# Altium PCB CAMERON.PcbDoc (part 2 of 2)
Units mil, origin at the board's own origin, x right, y up, seen from the top; angles counter-clockwise.
Board outline 6000 x 4900 mil, 4 copper layers (Top, POWER, GND, Bottom), stack 33.234 mil thick; 130 components, 113 nets, 631 pads, 154 vias.
Unrouted connection lines stored in the file: 5.
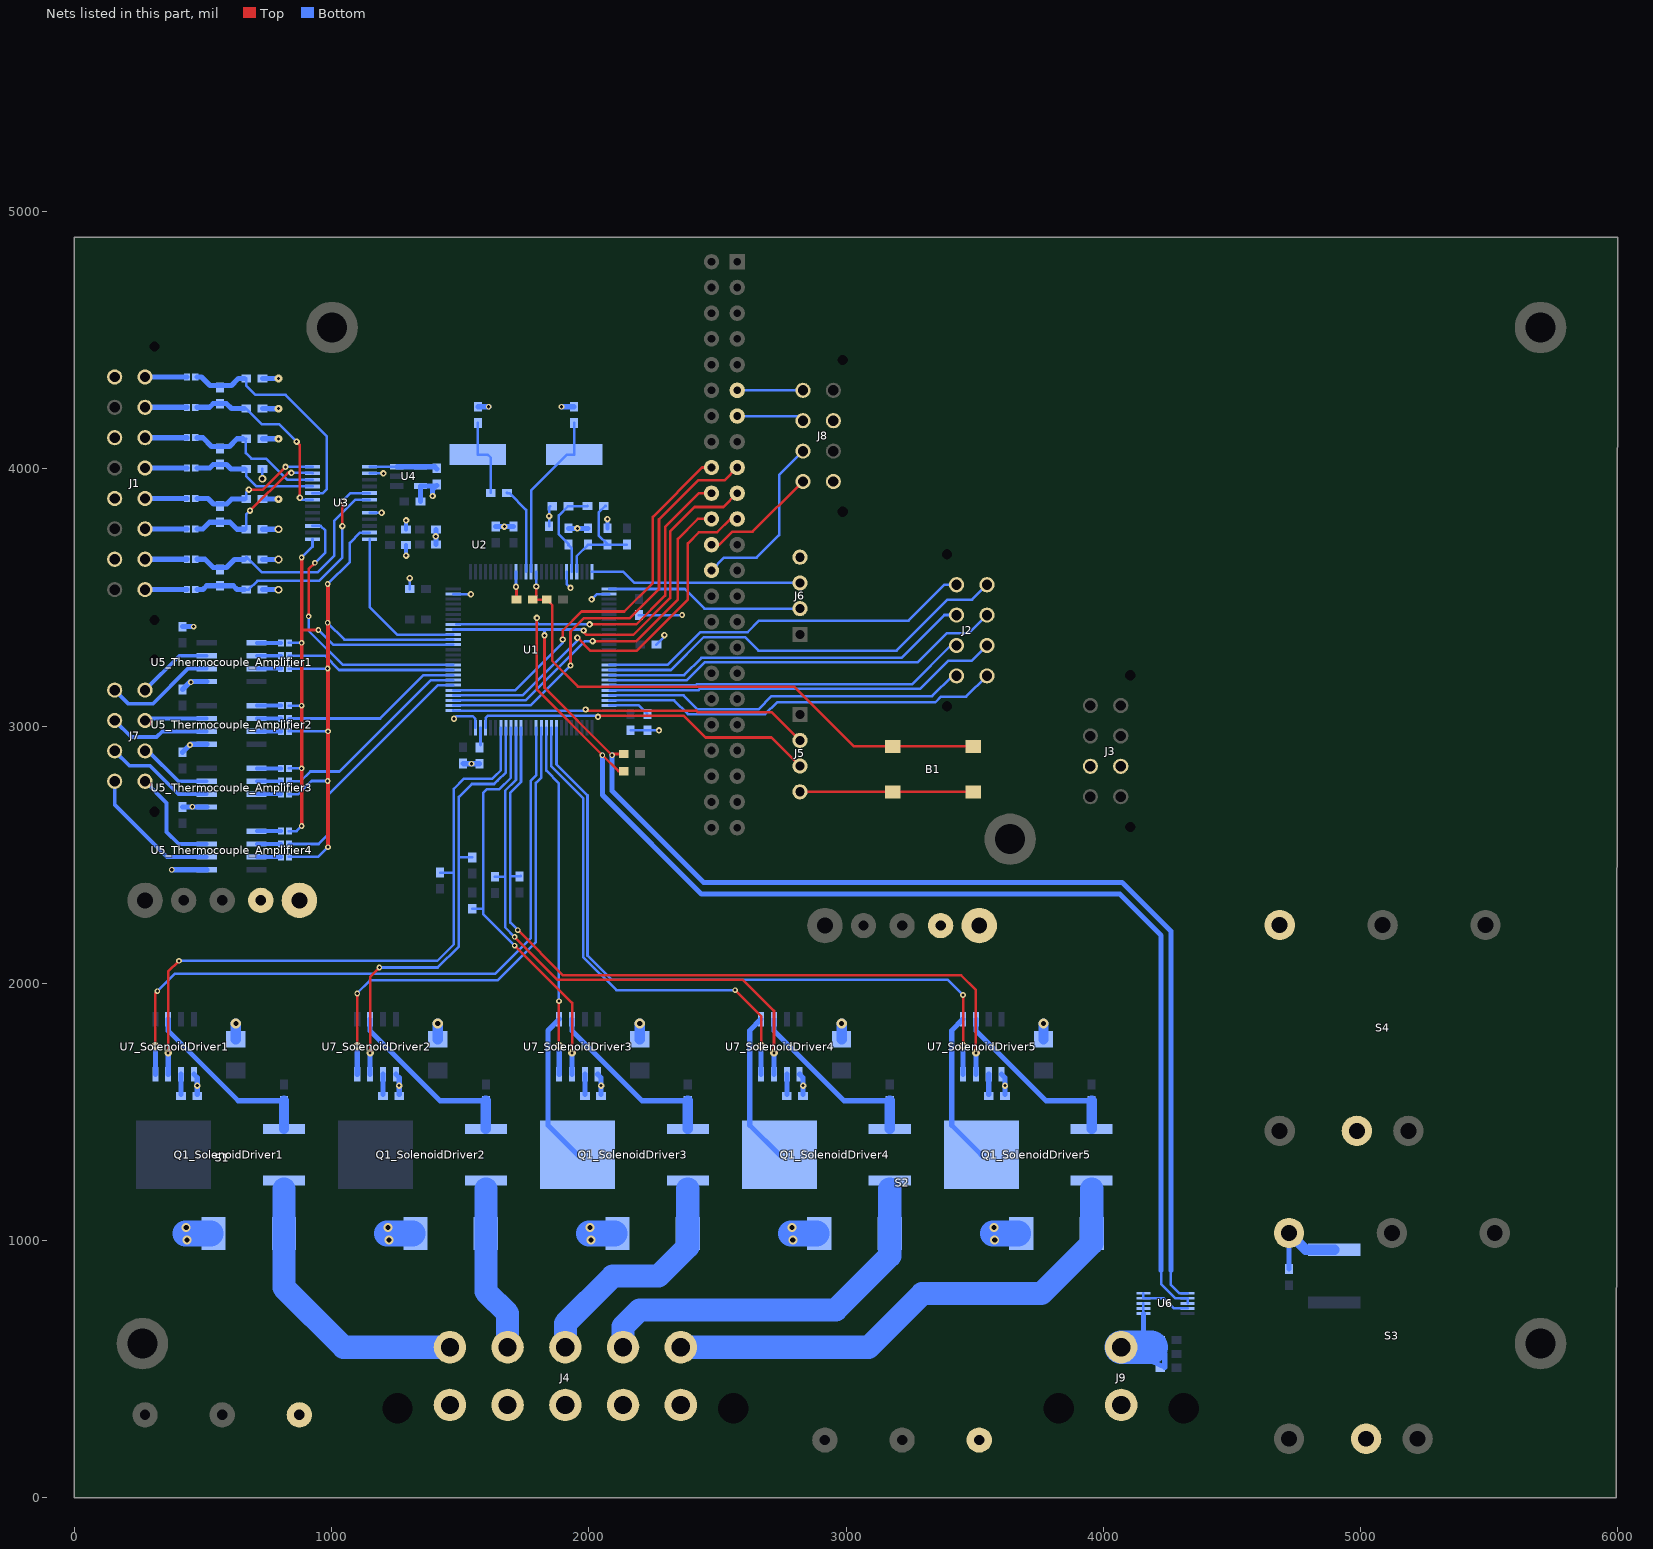
[diagram p4: the nets of this part, all layers, seen from the top]

## Via types
v1: diameter 25, hole 12, Top to Bottom, tented both sides, 50 vias
v2: diameter 22, hole 12, Top to Bottom, tented both sides, 45 vias
v3: diameter 50, hole 28, Top to Bottom, 16 vias
v4: diameter 40, hole 20, Top to Bottom, tented both sides, 15 vias
v5: diameter 30, hole 12, Top to Bottom, tented both sides, 14 vias
v6: diameter 35, hole 20, Top to Bottom, tented both sides, 10 vias
v7: diameter 30, hole 18, Top to Bottom, tented both sides, 4 vias

## Nets (pads, with @x,y where several pads share a name; then routed paths per layer and width w, separated by ;. In a path a pad name is that pad's centre, name@x,y a point inside that pad or via, vN(x,y) a via of type N, cw(c..) or ccw(c..) an arc to the next point about the centre after c; other vN are vias at no path point) (continued)
Gate_SolenoidDriver3: Q1_SolenoidDriver3.2 U7_SolenoidDriver3.5 | length 593.1
  Bottom w20: U7_SolenoidDriver3.5@1885,1861.28 1841,1817.28 1841,1448.93 Q1_SolenoidDriver3.2@1955.93,1334
Gate_SolenoidDriver4: Q1_SolenoidDriver4.2 U7_SolenoidDriver4.5 | length 593.1
  Bottom w20: U7_SolenoidDriver4.5@2670,1861.28 2626,1817.28 2626,1448.93 Q1_SolenoidDriver4.2@2740.93,1334
Gate_SolenoidDriver5: Q1_SolenoidDriver5.2 U7_SolenoidDriver5.5 | length 593.1
  Bottom w20: U7_SolenoidDriver5.5@3455,1861.28 3411,1817.28 3411,1448.93 Q1_SolenoidDriver5.2@3525.93,1334
GND: B1.2 C1.1 C2.1 C3.1 C4.1 C5.1 C6.1 C7.1 C8.1 C9.1 C10.1 C11.1 C12.1 C13.1 C14.2 C15.2 C16.1 C17.1 C19.1 C20.1 C22.1 C23.1 C26.1 C27.1 C28.1 C29.1 C30.1 C31.1 C32.1 C33.1 C34.1 C35.1 C36.1 C37_Thermocouple_Amplifier1.1 C37_Thermocouple_Amplifier2.1 C37_Thermocouple_Amplifier3.1 C37_Thermocouple_Amplifier4.1 C38_SolenoidDriver1.1 C38_SolenoidDriver2.1 C38_SolenoidDriver3.1 C38_SolenoidDriver4.1 C38_SolenoidDriver5.1 C39_SolenoidDriver1.1 C39_SolenoidDriver2.1 C39_SolenoidDriver3.1 C39_SolenoidDriver4.1 C39_SolenoidDriver5.1 D1_SolenoidDriver1.1 D1_SolenoidDriver2.1 D1_SolenoidDriver3.1 D1_SolenoidDriver4.1 D1_SolenoidDriver5.1 J1.1 J1.5 J1.9 J1.13 J3.5 J3.6 J4.2 J4.4 J4.6 J4.8 J4.10 J5.4 J6.4 J8.4 J8.8 J9.2 R4.1 S1.3 S1.4 S1.5 S2.3 S2.4 S2.5 S3.2 S3.5 S4.2 S4.5 U1.10 U1.20 U1.27 U1.74 U1.99 U3.14 U3.20 U4.5 U5_Thermocouple_Amplifier1.1 U5_Thermocouple_Amplifier2.1 U5_Thermocouple_Amplifier3.1 U5_Thermocouple_Amplifier4.1 U6.4 U6.5 U6.9 U7_SolenoidDriver1.1 U7_SolenoidDriver2.1 U7_SolenoidDriver3.1 U7_SolenoidDriver4.1 U7_SolenoidDriver5.1 | length 5045.9
  Top w10: v1(1717,3542) 1719,3540 C36.1@1719,3492 ; J5.4@2821,2745 B1.2@3491,2745
  Bottom w10: v7(731.31,3961.69) C29.1@731.31,4000.01 ; U3.20@1148,3829.61 v1(1194.61,3829.61) ; U3.14@1148,3983.16 v1(1201.84,3983.16) ; C2.1@1304.13,3533.37 v1(1304.13,3575.87) ; U1.99@1472.91,3513.69 1541.31,3513.69 v1(1542,3513) ; v1(1476,3029) 1486,3039 1549,3039 1559.52,3028.48 U1.74@1559.52,2994 ; v1(1717,3542) U1.10@1717,3600.3 ; C6.1@1846,3777 v1(1846,3817) 1846,3850.87 C15.2@1850.13,3855 ; U1.20@1913.85,3600.3 1913.85,3553.15 v1(1929,3538) ; v1(2011,3493) 2031.69,3513.69 U1.27@2079.2,3513.69 ; C4.1@2163,2984 C10.1@2228,2984 v1(2273,2984) ; C5.1@2195,3432 v2(2363,3432) ; R4.1@2263,3316.83 2294,3347.83 v1(2294,3354) ; U6.5@4156,795.72 U6.4@4156,776.02 4235.98,776.02 v2(4252,760) 4275.38,736.62 U6.9@4328,736.62
  Bottom w15: v1(1290,3663) C22.1@1290,3705 ; C23.1@1290,3764 v1(1290,3800) ; C13.1@2072.33,3769.13 v1(2072.33,3805.33)
  Bottom w20: v2(379,2442) U5_Thermocouple_Amplifier4.1@514.95,2442 ; C37_Thermocouple_Amplifier4.1@421,2686 U5_Thermocouple_Amplifier3.1@514.95,2686 ; C37_Thermocouple_Amplifier3.1@421,2899 452,2930 U5_Thermocouple_Amplifier2.1@514.95,2930 ; C37_Thermocouple_Amplifier2.1@421,3143 452,3174 U5_Thermocouple_Amplifier1.1@514.95,3174 ; C37_Thermocouple_Amplifier1.1@421,3387 v2(464,3387) ; U7_SolenoidDriver1.1@465,1646.72 478,1633.72 v1(478,1603) C39_SolenoidDriver1.1@478,1568 ; C33.1@731.31,3531 793.77,3531 v7(794,3530.77) ; C32.1@731.31,3648.25 793.77,3648.25 v7(794,3648.02) ; C31.1@731.31,3765.51 793.77,3765.51 v7(794,3765.28) ; C30.1@731.31,3882.76 793.77,3882.76 v5(794,3882.53) ; C28.1@731.31,4117.27 793.77,4117.27 v5(794,4117.04) ; C27.1@731.31,4234.52 759.03,4234.52 759.26,4234.29 v5(794,4234.29) ; C26.1@731.31,4351.77 793.77,4351.77 v5(794,4351.54) ; U7_SolenoidDriver2.1@1250,1646.72 1263,1633.72 v1(1263,1603) C39_SolenoidDriver2.1@1263,1568 ; C35.1@1346,3874 U4.5@1346,3933.94 C34.1@1405.2,3933.94 ; v1(1393,3895) 1393,3920.4 C34.1@1409,3936.4 ; C19.1@1406,3706 C20.1@1406,3765 ; C3.1@1511.78,2855 1512.78,2854 v2(1544,2854) C11.1@1574,2854 ; C16.1@1569,4242 v2(1611,4242) ; C1.1@1638.26,3776 v1(1672,3776) C7.1@1708,3776 ; v2(1894,4242) C17.1@1943,4242 ; C14.2@1921.33,3769.13 C12.1@1996.67,3769.13 ; U7_SolenoidDriver3.1@2035,1646.72 2048,1633.72 v1(2048,1603) C39_SolenoidDriver3.1@2048,1568 ; U7_SolenoidDriver4.1@2820,1646.72 2833,1633.72 v1(2833,1603) C39_SolenoidDriver4.1@2833,1568 ; U7_SolenoidDriver5.1@3605,1646.72 3618,1633.72 v1(3618,1603) C39_SolenoidDriver5.1@3618,1568 ; C9.1@4722,890 S3.5@4722,1030
  Bottom w40: C38_SolenoidDriver1.1@628,1783 v4(628,1844) ; C38_SolenoidDriver2.1@1413,1783 v4(1413,1844) ; C38_SolenoidDriver3.1@2198,1783 v4(2198,1844) ; C38_SolenoidDriver4.1@2983,1783 v4(2983,1844) ; C38_SolenoidDriver5.1@3768,1783 v4(3768,1844) ; S3.5@4722,1030 4787.28,964.72 C8.1@4898,964.72
  Bottom w100: 431,1028 D1_SolenoidDriver1.1@530,1028 ; 1216,1028 D1_SolenoidDriver2.1@1315,1028 ; 2001,1028 D1_SolenoidDriver3.1@2100,1028 ; 2786,1028 D1_SolenoidDriver4.1@2885,1028 ; 3571,1028 D1_SolenoidDriver5.1@3670,1028
  other v1: 1405,3738 1956,3769
  other v2: 459,2687 450,2927 453,3171
  other v6: 438,1003 1223,1003 2008,1003 2793,1003 3578,1003 435,1051 1220,1051 2005,1051 2790,1051 3575,1051
GPIO1: J2.8 U1.41 | length 1480.3
  Bottom w10: U1.41@2079.2,3238.09 2306.09,3238.09 2434,3366 2460.24,3366 2460.57,3365.67 2593.7,3365.67 2594.03,3366 2618,3366 2662,3410 3243,3410 3383.44,3550.44 J2.8@3429.89,3550.44
GPIO2: J2.7 U1.42 | length 1649.2
  Bottom w10: U1.42@2079.2,3218.41 2319.41,3218.41 2447,3346 2607,3346 2659,3294 3197,3294 3395,3492 3490,3492 J2.7@3548,3550
GPIO3: J2.6 U1.43 | length 1447.4
  Bottom w10: U1.43@2079.2,3198.72 2370.72,3198.72 2437.67,3265.67 3215.67,3265.67 3382.33,3432.33 J2.6@3429.89,3432.33
GPIO4: J2.5 U1.44 | length 1573.5
  Bottom w10: U1.44@2079.2,3179.04 2381.04,3179.04 2451,3249 3279,3249 3391,3361 3477.11,3361 J2.5@3548,3431.89
I2C_SCL: R17.2 U1.92 U2.19 U6.6 | length 6132.3
  Top w10: v1(1828,3353) 1828,3150 v2(2091,2887) 2096,2892 R17.2@2136,2892 ; v1(1980,3372) 1980,3365.64 1990.64,3355 2173,3355 2316,3498 2316,3757 2411,3852 2523.46,3852 U2.19@2577.13,3905.67
  Bottom w10: U1.92@1472.91,3375.89 1828,3375.89 ; v1@1828,3352 v1(1828,3353) 1828,3375.89 ; v1(1980,3372) 1976.11,3375.89 1828,3375.89 ; 4263,885 4263,828 4295.28,795.72 U6.6@4328,795.72
  Bottom w20: v2(2091,2887) 2091,2748 2446,2393 4072.74,2393 4263,2202.74 4263,885
I2C_SDA: R18.2 U1.93 U2.20 U6.7 U6.8 | length 6191.6
  Top w10: v1(1798,3421) 1798,3142 v2(2053,2887) 2115,2825 R18.2@2136,2825 ; v1(2003,3395.57) 2184.57,3395.57 2297,3508 2297,3775.04 2427.64,3905.67 U2.20@2477.13,3905.67
  Bottom w10: U1.93@1484.52,3395.57 1806,3395.57 ; v1(1798,3421) 1798,3403.57 1806,3395.57 ; v1(2003,3395.57) 2002.13,3396.44 1806.87,3396.44 1806,3395.57 ; 4225,884 4225,832 4280.98,776.02 U6.7@4328,776.02 U6.8@4328,756.32
  Bottom w20: v2(2053,2887) 2053,2732.26 2438.26,2347 4065,2347 4225,2187 4225,884
LimSwitch1-P1: J2.2 U1.47 | length 1427
  Bottom w10: U1.47@2079.2,3119.98 2369.02,3119.98 2423.33,3065.67 2659.67,3065.67 2711,3117 3335,3117 3413.67,3195.67 J2.2@3429.89,3195.67
LimSwitch1-P2: J2.1 U1.48 | length 1552.5
  Bottom w10: U1.48@2079.2,3100.3 2331.7,3100.3 2385,3047 2686,3047 2732,3093 3347,3093 3369,3115 3467.33,3115 J2.1@3548,3195.67
LimSwitch2-P1: J2.4 U1.45 | length 1412.7
  Bottom w10: U1.45@2081.2,3159.63 2416.63,3159.63 2420,3163 3256,3163 3407.22,3314.22 J2.4@3429.89,3314.22
LimSwitch2-P2: J2.3 U1.46 | length 1592.8
  Bottom w10: U1.46@2081.2,3139.94 2426.94,3139.94 2433,3146 3289,3146 3397,3254 3488.22,3254 J2.3@3548,3313.78 ; 2342.67,3139.67 2396.67,3139.67
MISO: SB2_Thermocouple_Amplifier1.2 SB2_Thermocouple_Amplifier2.2 SB2_Thermocouple_Amplifier3.2 SB2_Thermocouple_Amplifier4.2 U1.90 U3.23 | length 2470.8
  Top w10: v2(985,2787) v2@986,2788
  Top w15: v2(985,3224) 986,3225 986,3552 v2(985,3553) ; v2(986,2530) 986,2788 v2(986,2980) v2@986,3224
  Bottom w10: SB2_Thermocouple_Amplifier4.2@834.69,2492 948,2492 v2(986,2530) ; SB2_Thermocouple_Amplifier3.2@834.69,2736 871,2736 922,2787 v2(985,2787) ; SB2_Thermocouple_Amplifier2.2@834.69,2980 836.69,2982 SB2_Thermocouple_Amplifier2.2@837.69,2981 ; SB2_Thermocouple_Amplifier1.2@834.69,3224 v2(985,3224) ; SB2_Thermocouple_Amplifier2.2@837.69,2980 v2(986,2980) ; v2(985,3402) 1050.48,3336.52 U1.90@1472.91,3336.52 ; v2(985,3553) 1071,3639 1071,3713 1110.84,3752.84 U3.23@1148,3752.84
MOSI: U1.91 U3.24 | length 633.4
  Bottom w10: U3.24@1148,3727.25 1148,3463 1254.8,3356.2 U1.91@1472.91,3356.2
NetC10_2: C10.2 U1.49 | length 162.7
  Bottom w10: U1.49@2079.2,3080.61 2194.39,3080.61 C10.2@2228,3047
NetC11_2: C11.2 U1.73 | length 67.2
  Bottom w10: C11.2@1579.2,2926.8 U1.73@1579.2,2994
NetC12_2: C12.2 C13.2 FB1.1 R1.2 U1.22 | length 451.9
  Bottom w10: U1.22@1953.22,3600.3 1953.22,3660.72 1996.67,3704.17 C12.2@1996.67,3706.13 C13.2@2072,3706.13 ; R1.2@2066,3856 2064.03,3856 2038,3829.97 2038,3742.1 2072,3708.1 C13.2@2072,3706.13 ; FB1.1@2148,3706.13 C13.2@2072.33,3706.13 C13.2@2072,3706.13
NetC14_1: C14.1 C15.1 R1.1 U1.21 | length 366.2
  Bottom w10: U1.21@1933.54,3600.3 1933.54,3691.96 1921.33,3704.17 C14.1@1921.33,3706.13 1921.33,3708.1 1884,3745.44 1884,3819.97 1919.03,3855 C15.1@1921,3855 1994.13,3855 R1.1@1995.13,3856
NetC16_2: C16.2 R2.1 X1.1 | length 315
  Bottom w10: C16.2@1569,4179 X1.1@1569,4056 1607,4056 1619,4044 R2.1@1619,3907
NetC18_1: C18.1 C27.2 R6.2 U3.7 | length 723
  Top w10: v1(864,4106) 876,4094 876,3888 v1(877,3888)
  Bottom w10: C27.2@668.31,4234.52 729.83,4173 797,4173 v1(864,4106) ; v1(877,3888) 877,3885 881.2,3880.8 U3.7@926,3880.8
  Bottom w20: R6.2@478,4239.66 526.01,4239.66 540.25,4253.91 C18.1@566,4253.91 591.75,4253.91 611.13,4234.52 C27.2@660.45,4234.52
NetC18_2: C18.2 C26.2 R5.2 U3.8 | length 898
  Bottom w10: C26.2@668.31,4351.77 668.31,4323.69 704,4288 821,4288 982,4127 982,3922 966.39,3906.39 U3.8@926,3906.39
  Bottom w20: R5.2@478,4357.77 494.81,4357.77 527.81,4324.77 610.73,4324.77 637.73,4351.77 C26.2@660.45,4351.77
NetC21_1: C21.1 C29.2 R8.2 U3.9 | length 496.9
  Bottom w10: C29.2@668.31,4000.01 668.31,3972.69 709.02,3931.98 U3.9@926,3931.98
  Bottom w20: R8.2@478,4003.44 526.79,4003.44 540.25,4016.91 C21.1@566,4016.91 591.75,4016.91 608.64,4000.01 C29.2@660.45,4000.01
NetC21_2: C21.2 C28.2 R7.2 U3.10 | length 578.7
  Bottom w10: C28.2@668.31,4117.27 655.73,4117.27 667,4106 667,4062 689,4040 746,4040 828.43,3957.57 U3.10@926,3957.57
  Bottom w20: R7.2@478,4121.55 499.81,4121.55 533.59,4087.77 603.24,4087.77 632.73,4117.27 C28.2@655.73,4117.27
NetC24_1: C24.1 C31.2 R10.2 U3.11 | length 587.6
  Top w10: v1(683,3838) 830,3985 v1(844,3985)
  Bottom w10: C31.2@668.31,3765.51 668.31,3823.31 v1(683,3838) ; v1(844,3985) 924.16,3985 U3.11@926,3983.16
  Bottom w20: R10.2@478,3767.22 499.81,3767.22 525.36,3792.77 C24.1@567,3792.77 605.47,3792.77 632.73,3765.51 C31.2@660.45,3765.51
NetC24_2: C24.2 C30.2 R9.2 U3.12 | length 524.8
  Top w10: v1(679,3920) 733,3920 v1(821,4008)
  Bottom w10: C30.2@668.31,3882.76 668.31,3909.31 v1(679,3920) ; v1(821,4008) 925.25,4008 U3.12@926,4008.75
  Bottom w20: R9.2@478,3885.33 519.56,3885.33 541.25,3863.64 592.75,3863.64 611.87,3882.76 C30.2@660.45,3882.76
NetC25_1: C25.1 C33.2 R12.2 U3.17 | length 958.3
  Top w10: v1(1042,3778) v1(1042,3875)
  Bottom w10: C33.2@668.31,3531 678,3531 712,3565 951,3565 1042,3656 v1(1042,3778) ; v1(1042,3875) 1073.39,3906.39 U3.17@1148,3906.39
  Bottom w20: R12.2@478,3531 499.81,3531 514.72,3545.91 C25.1@566,3545.91 617.83,3545.91 632.73,3531 C33.2@660.45,3531
NetC25_2: C25.2 C32.2 R11.2 U3.18 | length 921.2
  Bottom w10: C32.2@668.31,3648.25 668.31,3659.31 729.63,3598 946,3598 1010,3662 1010,3797 1093.8,3880.8 U3.18@1148,3880.8
  Bottom w20: R11.2@478,3649.11 507.91,3649.11 540.25,3616.77 591.75,3616.77 623.23,3648.25 C32.2@660.45,3648.25
NetC39_SolenoidDriver1_2: C39_SolenoidDriver1.2 U7_SolenoidDriver1.2 | length 78.7
  Bottom w20: C39_SolenoidDriver1.2@415,1568 U7_SolenoidDriver1.2@415,1646.72
NetC39_SolenoidDriver2_2: C39_SolenoidDriver2.2 U7_SolenoidDriver2.2 | length 78.7
  Bottom w20: C39_SolenoidDriver2.2@1200,1568 U7_SolenoidDriver2.2@1200,1646.72
NetC39_SolenoidDriver3_2: C39_SolenoidDriver3.2 U7_SolenoidDriver3.2 | length 78.7
  Bottom w20: C39_SolenoidDriver3.2@1985,1568 U7_SolenoidDriver3.2@1985,1646.72
NetC39_SolenoidDriver4_2: C39_SolenoidDriver4.2 U7_SolenoidDriver4.2 | length 78.7
  Bottom w20: C39_SolenoidDriver4.2@2770,1568 U7_SolenoidDriver4.2@2770,1646.72
NetC39_SolenoidDriver5_2: C39_SolenoidDriver5.2 U7_SolenoidDriver5.2 | length 78.7
  Bottom w20: C39_SolenoidDriver5.2@3555,1568 U7_SolenoidDriver5.2@3555,1646.72
NetJ8_1: J8.1 U2.11 | length 255.6
  Bottom w10: U2.11@2577.13,4305.67 J8.1@2832.71,4305.67
NetJ8_3: J8.3 U2.13 | length 263.1
  Bottom w10: U2.13@2577.13,4205.67 2814.6,4205.67 J8.3@2832.71,4187.56
NetJ8_5: J8.5 U2.26 | length 684.6
  Bottom w10: U2.26@2477.13,3605.67 2526.46,3655 2652,3655 2740,3743 2740,3976.74 J8.5@2832.71,4069.45
NetJ8_7: J8.7 U2.24 | length 457.3
  Top w10: U2.24@2477.13,3705.67 2507.67,3705.67 2558,3756 2637.37,3756 J8.7@2832.71,3951.34
NetJ9_1: J9.1 R14.1 R15.1 R16.1 U6.1 U6.2 U6.3 | length 590.2
  Bottom w10: U6.1@4156,716.92 U6.2@4156,736.62 U6.3@4156,756.32 ; R16.1@4232.68,616 4232.68,622.63 R16.1@4239.32,616
  Bottom w20: J9.1@4069.91,585.83 4239.32,508 R14.1@4239.32,562 ; 4156,580.65 U6.1@4156,716.92 ; 4156,615.65 4185.83,585.83
  Bottom w130: J9.1@4069.91,585.83 4185.83,585.83
NetQ1_SolenoidDriver1_1: Q1_SolenoidDriver1.1 R20_SolenoidDriver1.1 U7_SolenoidDriver1.6 | length 718
  Bottom w20: U7_SolenoidDriver1.6@365,1861.28 365,1816 637,1544 R20_SolenoidDriver1.1@815,1544
  Bottom w40: R20_SolenoidDriver1.1@815,1544 815,1434.06 Q1_SolenoidDriver1.1@815.06,1434
NetQ1_SolenoidDriver2_1: Q1_SolenoidDriver2.1 R20_SolenoidDriver2.1 U7_SolenoidDriver2.6 | length 718
  Bottom w20: U7_SolenoidDriver2.6@1150,1861.28 1150,1816 1422,1544 R20_SolenoidDriver2.1@1600,1544
  Bottom w40: R20_SolenoidDriver2.1@1600,1544 1600,1434.06 Q1_SolenoidDriver2.1@1600.06,1434
NetQ1_SolenoidDriver3_1: Q1_SolenoidDriver3.1 R20_SolenoidDriver3.1 U7_SolenoidDriver3.6 | length 718
  Bottom w20: U7_SolenoidDriver3.6@1935,1861.28 1935,1816 2207,1544 R20_SolenoidDriver3.1@2385,1544
  Bottom w40: R20_SolenoidDriver3.1@2385,1544 2385,1434.06 Q1_SolenoidDriver3.1@2385.06,1434
NetQ1_SolenoidDriver4_1: Q1_SolenoidDriver4.1 R20_SolenoidDriver4.1 U7_SolenoidDriver4.6 | length 718
  Bottom w20: U7_SolenoidDriver4.6@2720,1861.28 2720,1816 2992,1544 R20_SolenoidDriver4.1@3170,1544
  Bottom w40: R20_SolenoidDriver4.1@3170,1544 3170,1434.06 Q1_SolenoidDriver4.1@3170.06,1434
NetQ1_SolenoidDriver5_1: Q1_SolenoidDriver5.1 R20_SolenoidDriver5.1 U7_SolenoidDriver5.6 | length 718
  Bottom w20: U7_SolenoidDriver5.6@3505,1861.28 3505,1816 3777,1544 R20_SolenoidDriver5.1@3955,1544
  Bottom w40: R20_SolenoidDriver5.1@3955,1544 3955,1434.06 Q1_SolenoidDriver5.1@3955.06,1434
NetSB1_Thermocouple_Amplifier1_1: SB1_Thermocouple_Amplifier1.1 U5_Thermocouple_Amplifier1.6 | length 94.1
  Bottom w15: U5_Thermocouple_Amplifier1.6@709.05,3274 SB1_Thermocouple_Amplifier1.1@803.19,3274
NetSB1_Thermocouple_Amplifier2_1: SB1_Thermocouple_Amplifier2.1 U5_Thermocouple_Amplifier2.6 | length 94.1
  Bottom w15: U5_Thermocouple_Amplifier2.6@709.05,3030 SB1_Thermocouple_Amplifier2.1@803.19,3030
NetSB1_Thermocouple_Amplifier3_1: SB1_Thermocouple_Amplifier3.1 U5_Thermocouple_Amplifier3.6 | length 94.1
  Bottom w15: U5_Thermocouple_Amplifier3.6@709.05,2786 SB1_Thermocouple_Amplifier3.1@803.19,2786
NetSB1_Thermocouple_Amplifier4_1: SB1_Thermocouple_Amplifier4.1 U5_Thermocouple_Amplifier4.6 | length 94.1
  Bottom w15: U5_Thermocouple_Amplifier4.6@709.05,2542 SB1_Thermocouple_Amplifier4.1@803.19,2542
NetSB2_Thermocouple_Amplifier1_1: SB2_Thermocouple_Amplifier1.1 U5_Thermocouple_Amplifier1.7 | length 94.1
  Bottom w15: U5_Thermocouple_Amplifier1.7@709.05,3224 SB2_Thermocouple_Amplifier1.1@803.19,3224
NetSB2_Thermocouple_Amplifier2_1: SB2_Thermocouple_Amplifier2.1 U5_Thermocouple_Amplifier2.7 | length 94.1
  Bottom w15: U5_Thermocouple_Amplifier2.7@709.05,2980 SB2_Thermocouple_Amplifier2.1@803.19,2980
NetSB2_Thermocouple_Amplifier3_1: SB2_Thermocouple_Amplifier3.1 U5_Thermocouple_Amplifier3.7 | length 94.1
  Bottom w15: U5_Thermocouple_Amplifier3.7@709.05,2736 SB2_Thermocouple_Amplifier3.1@803.19,2736
NetSB2_Thermocouple_Amplifier4_1: SB2_Thermocouple_Amplifier4.1 U5_Thermocouple_Amplifier4.7 | length 94.1
  Bottom w15: U5_Thermocouple_Amplifier4.7@709.05,2492 SB2_Thermocouple_Amplifier4.1@803.19,2492
NetSB3_Thermocouple_Amplifier1_1: SB3_Thermocouple_Amplifier1.1 U5_Thermocouple_Amplifier1.5 | length 94.1
  Bottom w15: U5_Thermocouple_Amplifier1.5@709.05,3324 SB3_Thermocouple_Amplifier1.1@803.19,3324
NetSB3_Thermocouple_Amplifier2_1: SB3_Thermocouple_Amplifier2.1 U5_Thermocouple_Amplifier2.5 | length 94.1
  Bottom w15: U5_Thermocouple_Amplifier2.5@709.05,3080 SB3_Thermocouple_Amplifier2.1@803.19,3080
NetSB3_Thermocouple_Amplifier3_1: SB3_Thermocouple_Amplifier3.1 U5_Thermocouple_Amplifier3.5 | length 94.1
  Bottom w15: U5_Thermocouple_Amplifier3.5@709.05,2836 SB3_Thermocouple_Amplifier3.1@803.19,2836
NetSB3_Thermocouple_Amplifier4_1: SB3_Thermocouple_Amplifier4.1 U5_Thermocouple_Amplifier4.5 | length 94.1
  Bottom w15: U5_Thermocouple_Amplifier4.5@709.05,2592 SB3_Thermocouple_Amplifier4.1@803.19,2592
NetU1_77: U1.77 U2.17 | length 1723.5
  Top w10: v1(1929,3236) 1929,3368 1980,3419 2159,3419 2273,3533 2273,3804 2425,3956 2527.46,3956 U2.17@2577.13,4005.67
  Bottom w10: U1.77@1472.91,3080.61 1773.61,3080.61 v1(1929,3236)
OSC_IN: R2.2 U1.12 | length 342.2
  Bottom w10: R2.2@1682,3907 1683,3906 1691,3906 1756.37,3840.63 U1.12@1756.37,3600.3
OSC_OUT: C17.2 U1.13 X1.2 | length 664.3
  Bottom w10: U1.13@1776.06,3600.3 1776.06,3917.06 1915,4056 X1.2@1943,4056 C17.2@1943,4179
PT1+: J1.4 R6.1 | length 163.5
  Bottom w20: J1.4@275.11,4239.66 416.82,4239.66 R6.1@438.63,4239.66
PT1-: J1.2 R5.1 | length 163.5
  Bottom w20: J1.2@275.11,4357.77 416.82,4357.77 R5.1@438.63,4357.77
PT2+: J1.8 R8.1 | length 163.5
  Bottom w20: J1.8@275.11,4003.44 416.82,4003.44 R8.1@438.63,4003.44
PT2-: J1.6 R7.1 | length 163.5
  Bottom w20: J1.6@275.11,4121.55 416.82,4121.55 R7.1@438.63,4121.55
PT3+: J1.12 R10.1 | length 163.5
  Bottom w20: J1.12@275.11,3767.22 R10.1@438.63,3767.22
PT3-: J1.10 R9.1 | length 163.5
  Bottom w20: J1.10@275.11,3885.33 416.82,3885.33 R9.1@438.63,3885.33
PT4+: J1.16 R12.1 | length 163.5
  Bottom w20: J1.16@275.11,3531 R12.1@438.63,3531
PT4-: J1.14 R11.1 | length 163.5
  Bottom w20: J1.14@275.11,3649.11 R11.1@438.63,3649.11
PT_CS: U1.85 U3.3 | length 1090.5
  Top w10: v2(911,3427) 911,3611 v2(935,3635)
  Bottom w10: v2(911,3427) 911,3371 1043.91,3238.09 U1.85@1472.91,3238.09 ; U3.3@926,3778.43 957.57,3778.43 976,3760 976,3676 v2(935,3635)
Reset: B1.1 C36.2 R13.1 U1.14 | length 2188.4
  Top w10: v1(1796,3543) 1796,3506 C36.2@1782,3492 R13.1@1837,3492 1858,3471 1858,3254 1958,3154 2798.17,3154 3030.01,2922.17 B1.1@3493,2922.17
  Bottom w10: U1.14@1795.74,3600.3 1795.74,3543.26 v1(1796,3543)
SCK: SB3_Thermocouple_Amplifier1.2 SB3_Thermocouple_Amplifier2.2 SB3_Thermocouple_Amplifier3.2 SB3_Thermocouple_Amplifier4.2 U1.89 U3.1 | length 1950.8
  Top w10: 884,3374 v2(949,3374)
  Top w15: v2(884,2612) v2(884,2836) v2(884,3080) v2(884,3324) 884,3374 v2(884,3656)
  Bottom w10: SB3_Thermocouple_Amplifier4.2@834.69,2592 864,2592 v2(884,2612) ; SB3_Thermocouple_Amplifier3.2@834.69,2836 v2(884,2836) ; SB3_Thermocouple_Amplifier2.2@834.69,3080 v2(884,3080) ; SB3_Thermocouple_Amplifier1.2@834.69,3324 v2(884,3324) ; v2(884,3656) 926,3698 U3.1@926,3727.25 ; v2(949,3374) 1006.17,3316.83 U1.89@1472.91,3316.83
Slave_MISO: U1.79 U2.21 | length 1564.6
  Top w10: v1(1956,3344) 2007,3293 2186,3293 2385,3492 2385,3711 2428,3754 2499,3754 2550.67,3805.67 U2.21@2577.13,3805.67
  Bottom w10: U1.79@1472.91,3119.98 1741.98,3119.98 1956,3334 v1(1956,3344)
Slave_MOSI: U1.80 U2.18 | length 1541
  Top w10: v1(1899,3337) 1899,3373 1972,3446 2138,3446 2249,3557 2249,3814 2440.67,4005.67 U2.18@2477.13,4005.67
  Bottom w10: U1.80@1472.91,3139.67 1712.67,3139.67 1899,3326 v1(1899,3337)
Slave_SCK: U1.78 U2.22 | length 1434.6
  Top w10: v1(2015,3331) 2185,3331 2346,3492 2346,3728 2423.67,3805.67 U2.22@2477.13,3805.67
  Bottom w10: U1.78@1472.91,3100.3 1754.3,3100.3 1985,3331 v1(2015,3331)
SOL_FAULT1: R19_SolenoidDriver1.1 U1.69 U7_SolenoidDriver1.3 | length 2589.1
  Top w10: v5(365,1730) 365,2046 v2(407,2088)
  Bottom w10: v2(407,2088) 1411,2088 1475.31,2152.31 1475.31,2431 ; R19_SolenoidDriver1.1@1422,2431 1475.31,2431 ; U1.69@1657.94,2994 1657.94,2828.78 1632.08,2802.92 1624.16,2795 1513.47,2795 1475.31,2756.84 1475.31,2431
  Bottom w20: U7_SolenoidDriver1.3@365,1646.72 v5(365,1730)
SOL_FAULT2: R19_SolenoidDriver2.1 U1.68 U7_SolenoidDriver2.3 | length 1802
  Top w10: v5(1150,1730) 1150,2025.84 v2(1186,2061.84)
  Bottom w10: v2(1186,2061.84) 1412.68,2061.84 1495,2144.16 1495,2491 ; R19_SolenoidDriver2.1@1547,2490 1496,2490 1495,2491 ; U1.68@1677.63,2994 1677.63,2820.63 1646,2789 1632.31,2775.31 1545.31,2775.31 1495,2725 1495,2491
  Bottom w20: U7_SolenoidDriver2.3@1150,1646.72 v5(1150,1730)
SOL_FAULT3: R19_SolenoidDriver3.1 U1.67 U7_SolenoidDriver3.3 | length 1605.4
  Top w10: v2(1712,2147) 1935,1924 v5(1935,1730)
  Bottom w10: R19_SolenoidDriver3.1@1548,2290 1588,2290 1589,2291 ; U1.67@1697.31,2994 1697.31,2799.64 1652.68,2755 1604,2755 1589,2740 1589,2291 ; v2(1712,2147) 1589,2270 1589,2291
  Bottom w20: U7_SolenoidDriver3.3@1935,1646.72 v5(1935,1730)
SOL_FAULT4: R19_SolenoidDriver4.1 U1.66 U7_SolenoidDriver4.3 | length 2260.2
  Top w10: v2(1712,2181) 1879,2014 2599,2014 2720,1893 v5(2720,1730)
  Bottom w10: R19_SolenoidDriver4.1@1635,2415 1673.31,2415 1675.31,2417 ; v2(1712,2181) 1675.31,2217.69 1675.31,2417 ; U1.66@1717,2994 1717,2791.48 1675.31,2749.8 1675.31,2417
  Bottom w20: U7_SolenoidDriver4.3@2720,1646.72 v5(2720,1730)
SOL_FAULT5: R19_SolenoidDriver5.1 U1.65 U7_SolenoidDriver5.3 | length 3058.9
  Top w10: v2(1724,2207) 1900,2031 3448,2031 3505,1974 v5(3505,1730)
  Bottom w10: v2(1724,2207) 1695,2236 1695,2418 ; R19_SolenoidDriver5.1@1730,2416 1697,2416 1695,2418 ; R19_SolenoidDriver5.1@1735,2416 R19_SolenoidDriver5.1@1735,2418 ; U1.65@1736.69,2994 1736.69,2783.33 1695,2741.64 1695,2418
  Bottom w20: U7_SolenoidDriver5.3@3505,1646.72 v5(3505,1730)
SOL_OUT1: U1.62 U7_SolenoidDriver1.4 | length 2690.5
  Top w10: v5(315,1757) 315,1962 v2(323,1970)
  Bottom w10: v2(323,1970) 390,2037 1636,2037 1775,2176 1775,2788 1795.74,2808.74 U1.62@1795.74,2994
  Bottom w20: U7_SolenoidDriver1.4@315,1646.72 v5(315,1757)
SOL_OUT2: U1.61 U7_SolenoidDriver2.4 | length 1935
  Top w10: v5@1098,1759 v5(1100,1757) ; v5@1100,1759 v2(1100,1961)
  Bottom w10: v2(1100,1961) 1100,1963 1149,2012 1645,2012 1794,2161 1794,2780 1815.43,2801.43 U1.61@1815.43,2994
  Bottom w20: U7_SolenoidDriver2.4@1100,1646.72 v5(1100,1757)
SOL_OUT3: U1.60 U7_SolenoidDriver3.4 | length 1368.5
  Top w10: v2(1884,1931) 1884,1757 v5(1885,1757)
  Bottom w10: U1.60@1835.11,2994 1835.11,2826.89 1884,2778 v2(1884,1931)
  Bottom w20: U7_SolenoidDriver3.4@1885,1646.72 v5(1885,1757)
SOL_OUT4: U1.59 U7_SolenoidDriver4.4 | length 1955.6
  Top w10: v2(2569,1974) 2670,1873 v5(2670,1757)
  Bottom w10: U1.59@1854.8,2994 1854.8,2843.77 1978,2720.57 1978,2103 2107,1974 v2(2569,1974)
  Bottom w20: U7_SolenoidDriver4.4@2670,1646.72 v5(2670,1757)
SOL_OUT5: U1.58 U7_SolenoidDriver5.4 | length 2767.6
  Top w10: v5(3455,1757) v2(3455,1955)
  Bottom w10: U1.58@1874.48,2994 1874.48,2851.52 1995,2731 1995,2108 2088,2015 3395,2015 v2(3455,1955)
  Bottom w20: U7_SolenoidDriver5.4@3455,1646.72 v5(3455,1757)
SOL_PWR1: D1_SolenoidDriver1.2 J4.9 Q1_SolenoidDriver1.3 | length 1124.3
  Bottom w90: 815.06,1201 D1_SolenoidDriver1.2@815.06,1028 815.06,817.94 1047.17,585.83 J4.9@1460.18,585.83
SOL_PWR2: D1_SolenoidDriver2.2 J4.7 Q1_SolenoidDriver2.3 | length 650.2
  Bottom w90: 1600.06,1201 D1_SolenoidDriver2.2@1600.06,1028 1600.06,801.94 1684.59,717.41 J4.7@1684.59,585.83
SOL_PWR3: D1_SolenoidDriver3.2 J4.5 Q1_SolenoidDriver3.3 | length 916.6
  Bottom w90: J4.5@1909,585.83 1909,678 2093,862 2271,862 2385.06,976.06 D1_SolenoidDriver3.2@2385.06,1028 2385.06,1201
SOL_PWR4: D1_SolenoidDriver4.2 J4.3 Q1_SolenoidDriver4.3 | length 1490.9
  Bottom w90: J4.3@2133.41,585.83 2133.41,666.41 2198,731 2960,731 3170.06,941.06 D1_SolenoidDriver4.2@3170.06,1028 3170.06,1201
SOL_PWR5: D1_SolenoidDriver5.2 J4.1 Q1_SolenoidDriver5.3 | length 1975.6
  Bottom w90: J4.1@2357.82,585.83 3087.83,585.83 3296,794 3759,794 3955.06,990.06 D1_SolenoidDriver5.2@3955.06,1028 3955.06,1201
SWCLK: J5.2 U1.76 | length 1403.4
  Top w10: v1@1990,3064 1989,3065 v1(1988,3065) 1993,3060 2416.14,3060 2417.07,3060.93 2424,3054 2712,3054 J5.2@2821,2945
  Bottom w10: U1.76@1472.91,3060.93 1473.84,3060 1983,3060 v1(1988,3065)
SWDIO: J5.3 U1.72 | length 1347.5
  Top w10: v1(2036,3036) 2040,3040 2369.78,3040 2369.89,3040.11 2454,2956 2710,2956 J5.3@2821,2845
  Bottom w10: U1.72@1598.89,2994 1598.89,3031.89 1607,3040 2032,3040 v1(2036,3036)
T+1: J7.2 U5_Thermocouple_Amplifier1.3 | length 295.2
  Bottom w15: J7.2@275.11,3140.33 408.78,3274 U5_Thermocouple_Amplifier1.3@514.95,3274
T+2: J7.4 U5_Thermocouple_Amplifier2.3 | length 243.1
  Bottom w10: J7.4@275.11,3022.22 J7.4@282.89,3030
  Bottom w15: J7.4@282.89,3030 U5_Thermocouple_Amplifier2.3@514.95,3030
T+3: J7.6 U5_Thermocouple_Amplifier3.3 | length 288.8
  Bottom w15: J7.6@275.11,2904.11 286.89,2904.11 405,2786 U5_Thermocouple_Amplifier3.3@514.95,2786
T+4: J7.8 U5_Thermocouple_Amplifier4.3 | length 407.2
  Bottom w15: J7.8@275.11,2786 359,2702.11 359,2589 406,2542 U5_Thermocouple_Amplifier4.3@514.95,2542
T-1: J7.1 U5_Thermocouple_Amplifier1.2 | length 436.8
  Bottom w15: J7.1@157,3140.33 210.33,3087 305,3087 442,3224 U5_Thermocouple_Amplifier1.2@514.95,3224
T-2: J7.3 U5_Thermocouple_Amplifier2.2 | length 393.7
  Bottom w15: J7.3@157,3022.22 221.22,2958 320,2958 342,2980 U5_Thermocouple_Amplifier2.2@514.95,2980
T-3: J7.5 U5_Thermocouple_Amplifier3.2 | length 427.6
  Bottom w15: J7.5@157,2904.11 215.11,2846 294,2846 404,2736 U5_Thermocouple_Amplifier3.2@514.95,2736
T-4: J7.7 U5_Thermocouple_Amplifier4.2 | length 532.5
  Bottom w15: J7.7@157,2786 157,2696 361,2492 U5_Thermocouple_Amplifier4.2@514.95,2492
TC_CS1: SB1_Thermocouple_Amplifier1.2 U1.84 | length 661.2
  Bottom w10: SB1_Thermocouple_Amplifier1.2@834.69,3274 974,3274 1029.59,3218.41 U1.84@1472.91,3218.41
TC_CS2: SB1_Thermocouple_Amplifier2.2 U1.83 | length 708.1
  Bottom w10: SB1_Thermocouple_Amplifier2.2@834.69,3030 1189,3030 1357.72,3198.72 U1.83@1472.91,3198.72
TC_CS3: SB1_Thermocouple_Amplifier3.2 U1.82 | length 801
  Bottom w10: SB1_Thermocouple_Amplifier3.2@834.69,2786 880,2786 918,2824 1031,2824 1386.04,3179.04 U1.82@1472.91,3179.04
TC_CS4: SB1_Thermocouple_Amplifier4.2 U1.81 | length 984.1
  Bottom w10: SB1_Thermocouple_Amplifier4.2@834.69,2542 950,2542 987,2579 987,2733 1413.35,3159.35 U1.81@1472.91,3159.35
UART_RX: J6.2 U1.26 | length 773.4
  Bottom w10: U1.26@2079.2,3533.37 2373.63,3533.37 2450,3457 J6.2@2821,3457
UART_TX: J6.3 U1.25 | length 826.7
  Bottom w10: U1.25@2012.28,3600.3 2134.7,3600.3 2178,3557 J6.3@2821,3557
VRef: C34.2 U3.13 U4.3 U4.4 | length 264.3
  Bottom w10: U3.13@1148,4008.75 U4.3@1254,4008.75
  Bottom w20: U4.3@1254,4008.75 U4.4@1346,4008.75 C34.2@1401,4008.75 ; C34.2@1401,4007.4 C34.2@1409,3999.4
pads on no net: J1.NONE J2.NONE J3.NONE J4.NONE J7.NONE J8.NONE J9.NONE S1.2 S1.6 S2.2 S2.6 S3.4 S3.6 S4.4 S4.6 U1.1 U1.2 U1.3 U1.4 U1.5 U1.7 U1.8 U1.9 U1.15 U1.16 U1.17 U1.18 U1.23 U1.24 U1.29 U1.30 U1.31 U1.32 U1.33 U1.34 U1.35 U1.36 U1.38 U1.39 U1.40 U1.51 U1.52 U1.53 U1.54 U1.55 U1.56 U1.57 U1.63 U1.64 U1.70 U1.71 U1.86 U1.87 U1.88 U1.95 U1.96 U1.97 U1.98 U2.1 U2.2 U2.3 U2.4 U2.7 U2.8 U2.9 U2.10 U2.12 U2.14 U2.15 U2.16 U2.23 U2.25 U2.27 U2.28 U2.29 U2.30 U2.31 U2.32 U2.33 U2.34 U2.35 U2.36 U2.37 U2.38 U2.39 U2.40 U2.41 U2.42 U2.43 U2.44 U2.45 U2.46 U2.NONE U3.2 U3.4 U3.5 U3.6 U3.15 U3.16 U3.19 U5_Thermocouple_Amplifier1.8 U5_Thermocouple_Amplifier2.8 U5_Thermocouple_Amplifier3.8 U5_Thermocouple_Amplifier4.8 U7_SolenoidDriver1.7 U7_SolenoidDriver2.7 U7_SolenoidDriver3.7 U7_SolenoidDriver4.7 U7_SolenoidDriver5.7

## Polygon pours and split planes (outlines as drawn)
3V3 on POWER "3V3 Fill" (solid, pour order 18): 3318,2805 3318,3014 4678,3014 5290,3014 5290,2013 5805,2013 5805,2786 5805,4530 1100,4530 1100,3520 345,3520 345,2557 595,2557 595,2786 1392,2786 1392,2248 1811,2248 1811,2805
24V on POWER "24V-Fill" (solid, pour order 10): 3677,1781 3677,2807 4307.25,2807 4300,1725 4300,1544 121,1544 121,2443 1124,2443 1124,2023 2693,2023 2693,2443 3154,2443 3154,1781
36V on POWER "36V-Fill" (solid, pour order 12): 4918,44 4918,860 2795,860 2795,44
5V on Top "5V Fill" (solid, remove dead copper, pour order 22): 5939,804 5939,4767 86,4767 86,4610 86,804
3V3 on Bottom "3V3 Ground Pour" (solid, remove dead copper, pour order 24): 5885,4809 5885,1928 76,1928 76,4809
GND on GND (split plane): 5974.92,20.1 20.1,20.1 20.1,4879.9 5979.88,4879.9

## Other copper
Bottom:
  rectangle net 36V: 4422,341 5367,774
  rectangle net 36V: 4285,495 5170,638
  region net 36V: 4374,575
  region: 1467.8,5619.8

## Silkscreen, mask and mechanical layers (free items; w line width, h text height)
Top Overlay:
  circle w5: c275.11,4564.66 r9.43
  circle w5: c157,4564.66 r9.43
  circle w5: c275.11,4682.77 r9.43
  circle w5: c157,4682.77 r9.43
  lines w5: 92,4531 92,4774 349,4774 349,4531 92,4531
  text "PT / Legend" at 104,4777 h30
  text "GND" at 107,4714 h30
  text "PT-" at 255,4714 h30
  text "5V" at 107,4590 h30
  text "PT+" at 255,4590 h30
  text "PT Sensors" at 417,3751.11 h40 r90
  text "GND" at 2904,3634.01 h40
  text "TX" at 2904,3534.01 h40
  text "PE11" at 3638,3524.01 h40
  text "PE10" at 3182,3514.01 h40
  text "RX" at 2904,3434.01 h40
  text "UART2" at 2739,3415.59 h40 r90
  text "PE13" at 3638,3405.9 h40
  text "PE12" at 3182,3399.23 h40
  text "3V3" at 2904,3334.01 h40
  text "PE15" at 3638,3287.79 h40
  text "PE14" at 3182,3284.45 h40
  text "PB10" at 3182,3169.68 h40
  text "PB11" at 3638,3169.68 h40
  text "3V3" at 3748.99,3054.34 h40
  text "3V3" at 4165,3054.34 h40
  text "5V" at 3788.98,2936.23 h40
  text "5V" at 4165,2936.23 h40
  text "SWCLK" at 2896,2925.01 h40
  text "SWDIO" at 2896,2825.01 h40
  text "GND" at 3748.99,2818.12 h40
  text "GND" at 4165,2818.12 h40
  text "TC Sensors" at 417,2772 h40 r90
  text "GND" at 2896,2725.01 h40
  text "SWD Header" at 2740,2710 h40 r90
  text "24V" at 3748.99,2700.01 h40
  text "24V" at 4165,2700.01 h40
  text "RESET" at 3242,2620 h40
  text "- | +" at 141.58,2588 h40
  text "3V3 Regulator" at 4500,1643 h40 r90
  text "SOL 1" at 1480.17,785 h40 r90
  text "SOL 2" at 1704.58,785 h40 r90
  text "SOL 3" at 1928.99,785 h40 r90
  text "SOL 4" at 2153.4,785 h40 r90
  text "SOL 5" at 2377.81,785 h40 r90
  text "V+" at 4026,770 h60
  text "5V Regulator" at 4553,446 h40 r90
  text "GND" at 4008,127 h60
Mechanical 1:
  the board outline again, w5

## Dimensions
0,4900 to 6000,4900 on Mechanical 11
0,0 to 0,4900 on Mechanical 11

## Text inside footprints (layer, text, board x,y; h text height)
U2: Mechanical 13 "RJ45" at 1778,5441 h60 r270